# EAGLE board WAK-Shield-v11 (EAGLE 6.2)
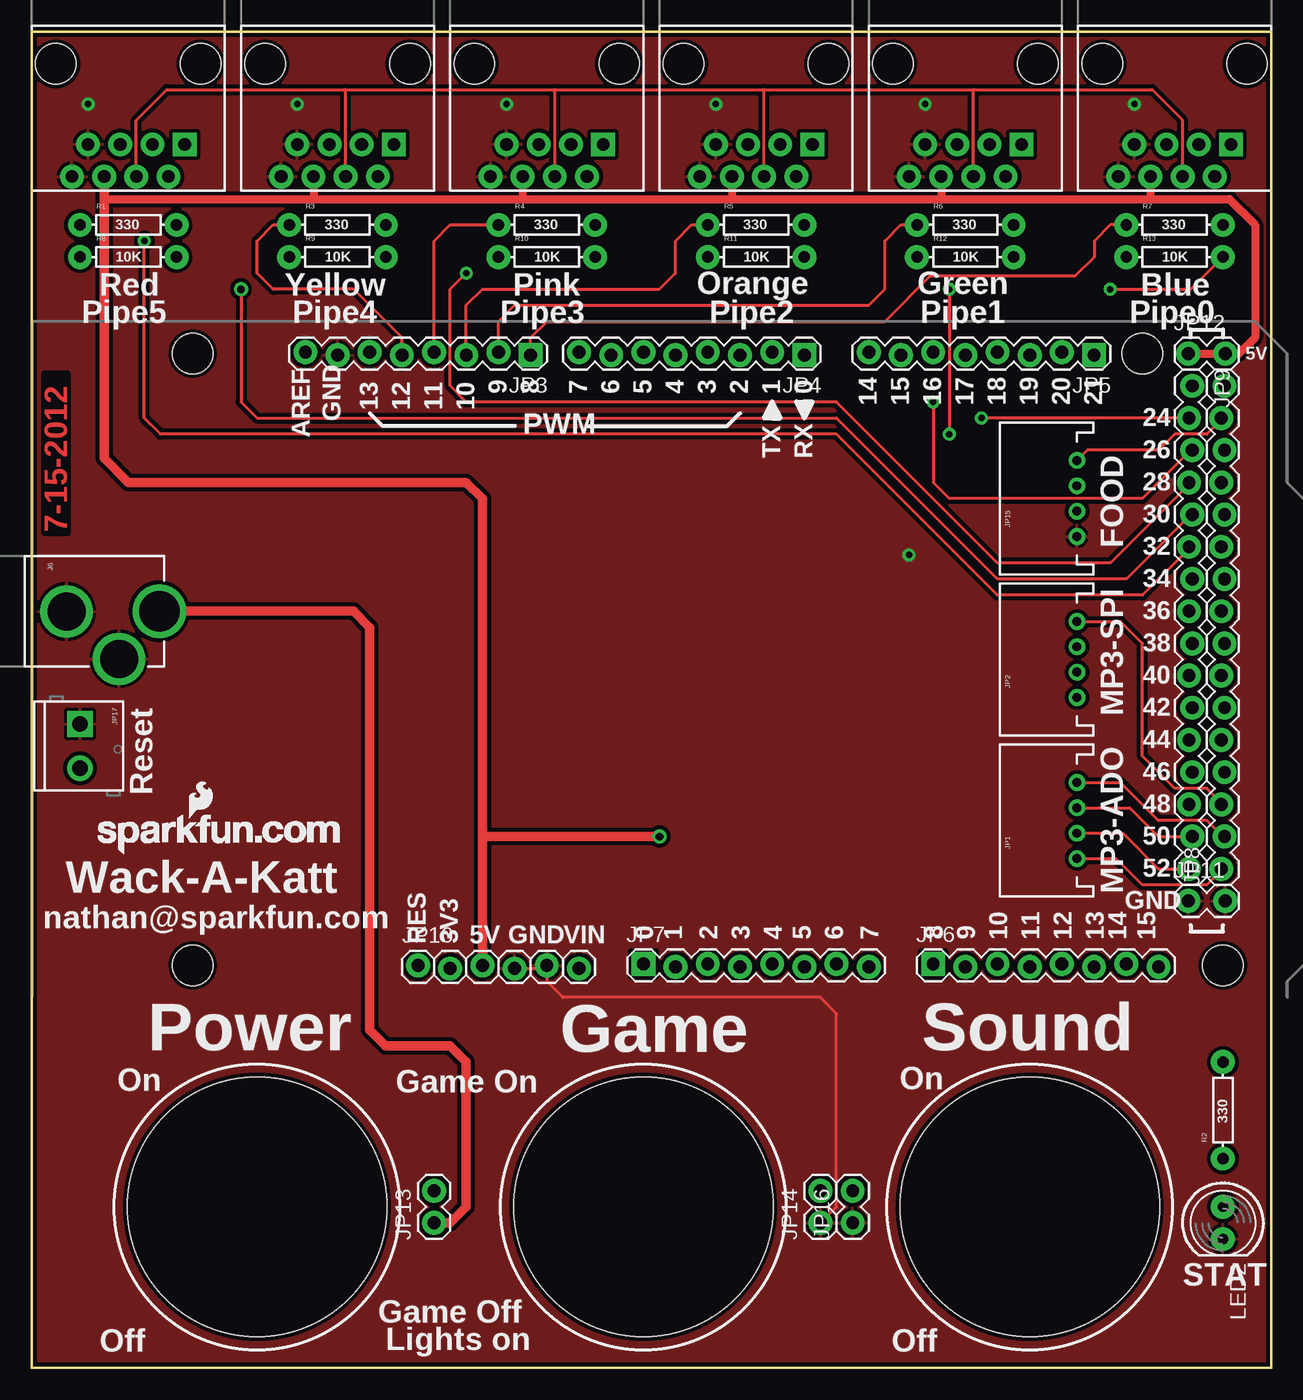
[diagram p0: board, top side]
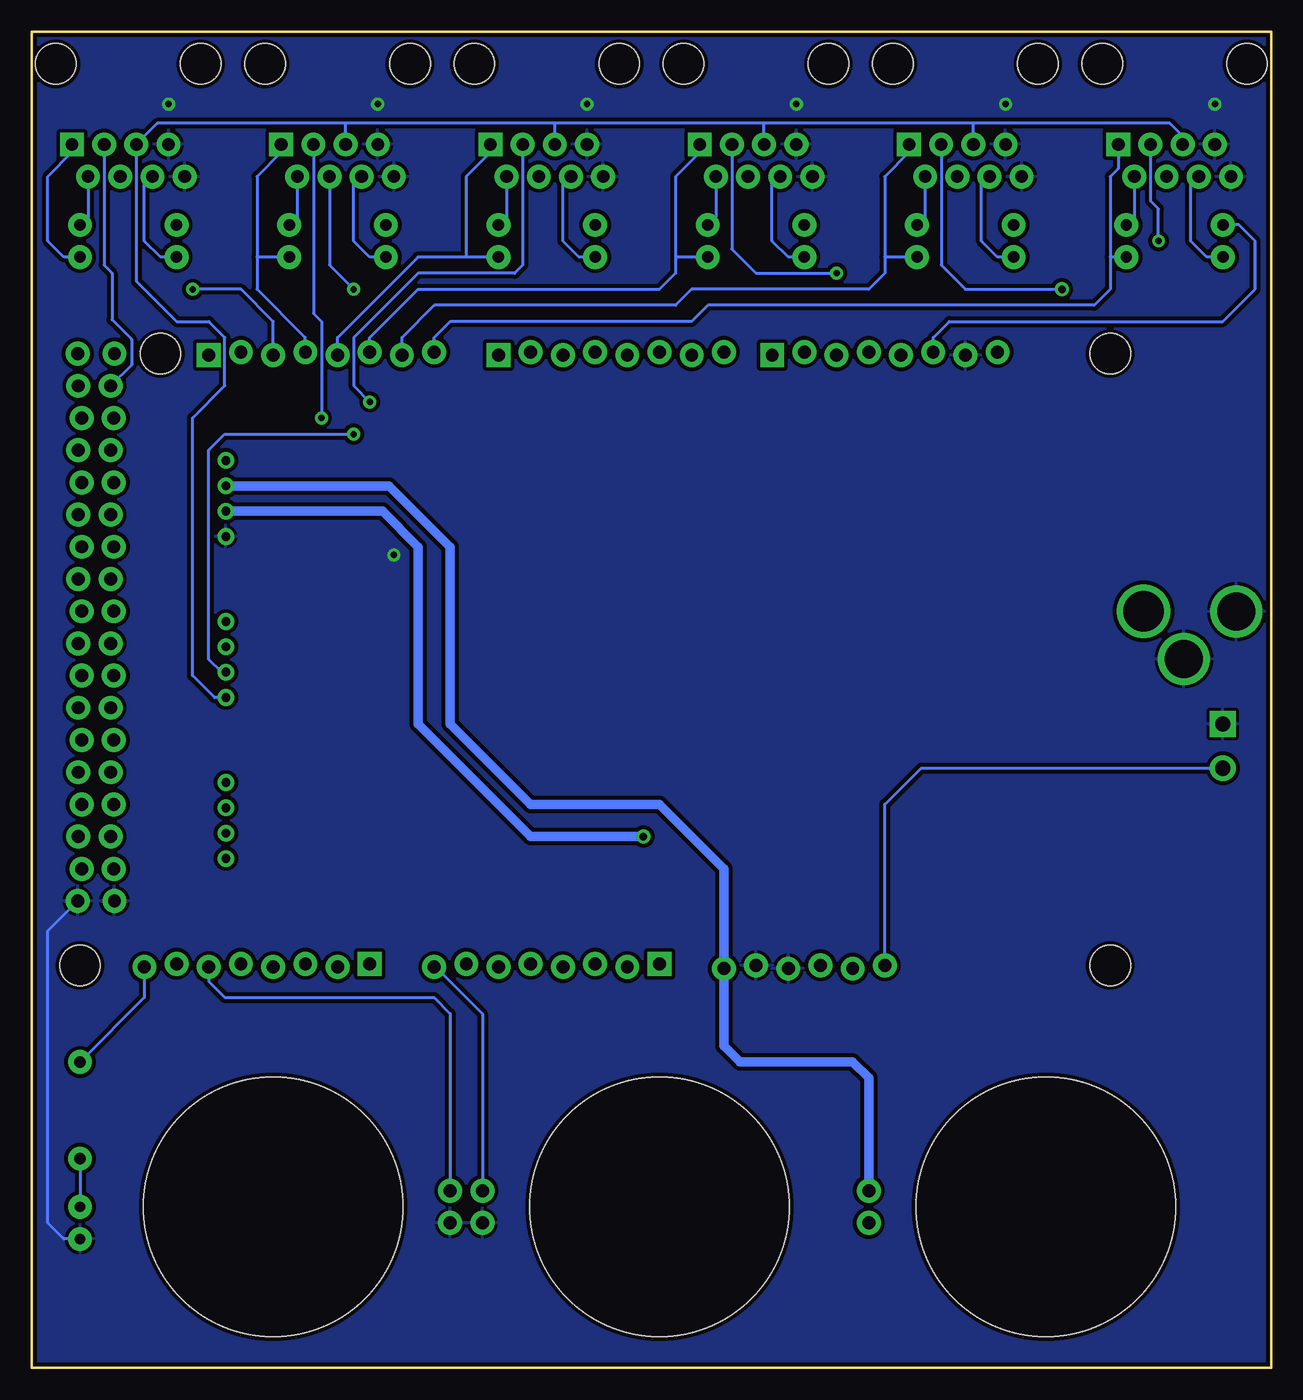
[diagram p1: board, bottom side, seen from below]

Size 97.79 x 105.41 mm. Coordinates in mm from the lower left corner, seen from the top.
Outline: 0,0 97.79,0 97.79,105.41 0,105.41 0,0
Copper layers (1*16): Top 0.035mm / dielectric 1.5mm / Bottom 0.035mm
Design rules: minimum track width 8mil, minimum drill 20mil, track to track 8mil, track to pad 8mil, pad to pad 8mil, via to via 8mil, smd to smd 8mil, copper to edge 10mil, drill to drill 8mil, minimum pad ring 12mil, minimum via ring 10mil, stop-mask expansion 4mil, vias tented up to drill 25mil, thermal gap 10mil
Holes 3.2 mm at 12.7,80.01 12.7,31.75 87.63,80.01 93.98,31.75
Holes 20.5 mm at 17.78,12.7 48.26,12.7 78.74,12.7

## Footprints (pad centres in the part's own frame; a part is rotated, then mirrored left to right if it is on the bottom)
RJ45-8 = drill 1 pad 1.88 square: 1 -4.445,6.35 | drill 1 pad 1.88: 2 -3.175,8.89; 3 -1.905,6.35; 4 -0.635,8.89; 5 0.635,6.35; 6 1.905,8.89; 7 3.175,6.35; 8 4.445,8.89 | hole 3.2: -5.715,0; 5.715,0
POWER_JACK_PTH_LOCK = drill 2.997 pad 4.115: GND 0.025,6.557; GNDBREAK 3.762,10.7 | drill 3.2 pad 4.115: PWR 0,13.878
JST-4-PTH = drill 0.7: 1 -3,-5; 2 -1,-5; 3 1,-5; 4 3,-5
1X08_LOCK = drill 1.016 pad 1.88 square: 1 0,0.127 | drill 1.016 pad 1.88: 2 2.54,-0.127; 3 5.08,0.127; 4 7.62,-0.127; 5 10.16,0.127; 6 12.7,-0.127; 7 15.24,0.127; 8 17.78,-0.127
1X16_LOCK = drill 1.016 pad 1.88: 1 0,0.127; 2 2.54,-0.127; 3 5.08,0.127; 4 7.62,-0.127; 5 10.16,0.127; 6 12.7,-0.127; 7 15.24,0.127; 8 17.78,-0.127; 9 20.32,0.127; 10 22.86,-0.127; 11 25.4,0.127; 12 27.94,-0.127; 13 30.48,0.127; 14 33.02,-0.127; 15 35.56,0.127; 16 38.1,-0.127
1X06_LOCK = drill 1.016 pad 1.88: 1 0,0; 2 2.54,-0.254; 3 5.08,0; 4 7.62,-0.254; 5 10.16,0; 6 12.7,-0.254
1X02_LOCK = drill 1.016 pad 1.88: 1 -0.178,0; 2 2.718,0
1X02 = drill 1.016 pad 1.88: 1 0,0; 2 2.54,0
SCREWTERMINAL-3.5MM-2 = drill 1.2 pad 2.032 square: 1 0,0 | drill 1.2 pad 2.032: 2 3.5,0
LED5MM = drill 0.813 pad 1.88: A -1.27,0; K 1.27,0
AXIAL-0.3 = drill 0.9 pad 1.88: P$1 -3.81,0; P$2 3.81,0

## Placement (x,y rotation side)
J0  RJ45  [RJ45-8]  90.17,102.87 180 top
J1  RJ45  [RJ45-8]  73.66,102.87 180 top
J2  RJ45  [RJ45-8]  57.15,102.87 180 top
J3  RJ45  [RJ45-8]  40.64,102.87 180 top
J4  RJ45  [RJ45-8]  24.13,102.87 180 top
J5  RJ45  [RJ45-8]  7.62,102.87 180 top
J6  12V  [POWER_JACK_PTH_LOCK]  -3.81,59.69 270 top
JP1  MP3-SPI  [JST-4-PTH]  77.47,43.18 90 top
JP2  MP3-ADO  [JST-4-PTH]  77.47,55.88 90 top
JP3  [1X08_LOCK]  39.37,80.01 180 top
JP4  [1X08_LOCK]  60.96,80.01 180 top
JP5  [1X08_LOCK]  83.82,80.01 180 top
JP6  [1X08_LOCK]  71.12,31.75 0 top
JP7  [1X08_LOCK]  48.26,31.75 0 top
JP8  M16LOCK  [1X16_LOCK]  93.98,39.37 90 top
JP9  M16LOCK  [1X16_LOCK]  91.44,77.47 270 top
JP10  [1X06_LOCK]  30.48,31.75 0 top
JP11  [1X02_LOCK]  91.44,36.83 0 top
JP12  [1X02_LOCK]  91.44,80.01 0 top
JP13  Power  [1X02]  31.75,11.43 90 top
JP14  Game  [1X02]  62.23,11.43 90 top
JP15  FOOD  [JST-4-PTH]  77.47,68.58 90 top
JP16  Audio  [1X02]  64.77,11.43 90 top
JP17  Reset  [SCREWTERMINAL-3.5MM-2]  3.81,50.8 270 top
LED2  Green  [LED5MM]  93.98,11.43 270 top
R1  330  [AXIAL-0.3]  7.62,90.17 0 top
R2  330  [AXIAL-0.3]  93.98,20.32 90 top
R3  330  [AXIAL-0.3]  24.13,90.17 0 top
R4  330  [AXIAL-0.3]  40.64,90.17 0 top
R5  330  [AXIAL-0.3]  57.15,90.17 0 top
R6  330  [AXIAL-0.3]  73.66,90.17 0 top
R7  330  [AXIAL-0.3]  90.17,90.17 0 top
R8  10K  [AXIAL-0.3]  7.62,87.63 0 top
R9  10K  [AXIAL-0.3]  24.13,87.63 0 top
R10  10K  [AXIAL-0.3]  40.64,87.63 0 top
R11  10K  [AXIAL-0.3]  57.15,87.63 0 top
R12  10K  [AXIAL-0.3]  73.66,87.63 0 top
R13  10K  [AXIAL-0.3]  90.17,87.63 0 top
U$1  LOGO-SFENEW  [SFE-NEW-WEBLOGO]  5.21,40.51 0 top
U$2  CREATIVE_COMMONS  [CREATIVE_COMMONS]  13.97,5.08 0 top

## Library data of the parts
J0 J1-J6 JP1 JP2 JP13-JP17 = SparkFun-Connectors
JP3-JP12 LED2 R1-R13 U$1 U$2 = SparkFun

## Nets
3.3: JP10.2
5V: J0.6 J1.6 J2.6 J3.6 J4.6 J5.6 JP10.3 JP12.1 JP12.2 JP15.2 R8.P$1 R9.P$1 R10.P$1 R11.P$1 R12.P$1 R13.P$1
A0: JP7.1
A1: JP7.2
A2: JP7.3
A3: JP7.4
A4: JP7.5
A5: JP7.6
A6: JP7.7
A7: JP7.8 JP14.2
A8: JP6.1
A9: JP6.2
A10: JP6.3
A11: JP6.4
A12: JP6.5
AREF: JP3.8
AUDIO-CTL: JP6.6 JP16.2
BTN0: J0.1 JP5.3 R13.P$2
BTN1: J1.1 JP5.4 R12.P$2
BTN2: J2.1 JP5.5 R11.P$2
BTN3: J3.1 JP5.6 R10.P$2
BTN4: J4.1 JP5.7 R9.P$2
BTN5: J5.1 JP5.8 R8.P$2
CTL0: J0.3 JP9.1
CTL1: J1.3 JP9.2
CTL2: J2.3 JP9.3
CTL3: J3.3 JP9.4
CTL4: J4.3 JP9.5
CTL5: J5.3 JP9.6
D2: JP4.3
D3: JP4.4
D4: JP4.5
D5: JP4.6
D6: JP4.7
D7: JP4.8
D34: JP9.7
D36: JP9.8
D37: JP8.9
D38: JP9.9
D39: JP8.8
D40: JP9.10
D41: JP8.7
D42: JP9.11
D43: JP8.6
D44: JP9.12
D45: JP8.5
D46: JP9.13
D47: JP8.4
D48: JP9.14
FOOD1: JP8.15 JP15.4
GND: J0.7 J0.8 J1.7 J1.8 J2.7 J2.8 J3.7 J3.8 J4.7 J4.8 J5.7 J5.8 J6.GND J6.GNDBREAK JP3.7 JP10.4 JP10.5 JP11.1 JP11.2 JP14.1 JP15.1 JP16.1 JP17.1 LED2.K
LED0: J0.2 R7.P$2
LED1: J1.2 R6.P$2
LED2: J2.2 R5.P$2
LED3: J3.2 R4.P$2
LED4: J4.2 R3.P$2
LED5: J5.2 R1.P$2
MISO: JP1.3 JP9.15
MOSI: JP1.4 JP8.2
MP3_RST: JP2.4 JP8.3
N$1: JP3.6 R1.P$1
N$2: JP3.5 R3.P$1
N$3: JP3.4 R4.P$1
N$4: JP3.3 R5.P$1
N$5: JP3.2 R6.P$1
N$6: JP3.1 R7.P$1
N$7: J6.PWR JP13.1
N$127: LED2.A R2.P$1
RES: JP10.1 JP17.2
RX0: JP4.1
SCL: JP5.1
SCLK: JP1.2 JP9.16
SD_CS: JP1.1 JP8.1
SDA: JP5.2
SIG-: J0.5 J1.5 J2.5 J3.5 J4.5 J5.5 JP2.1
SIG-L: J0.4 J1.4 J2.4 J3.4 J4.4 J5.4 JP2.2
SIG-R: JP2.3
STAT: JP6.8 R2.P$2
TX1: JP4.2
VIN: JP10.6 JP13.2 JP15.3

## Tracks (layer width: path | path; a pad name or v marks a point on that pad's centre or on a via)
3.3
  Top 0.203: JP10.2 33.02,31.75
5V  (via drill 0.6)
  Top 0.635: JP12.1 JP12.2 95.25,80.01 96.52,81.28 96.52,90.17 94.49,92.2 88.14,92.2 | 5.71,92.2 22.23,92.2 | 22.23,92.2 38.73,92.2 | 38.73,92.2 55.12,92.2 | 55.12,92.2 71.75,92.2 | 71.75,92.2 88.14,92.2 | J0.6 88.27,92.33 88.14,92.2 | J4.6 22.23,92.2 | J3.6 38.73,92.2 | J2.6 55.24,92.33 55.12,92.2 | J1.6 71.75,92.2
  Top 0.762: v49.53,41.91 35.56,41.91 | JP10.3 35.56,41.91 | 35.56,41.91 35.56,68.58 34.29,69.85 7.62,69.85 5.71,71.75 5.71,92.2 J5.6
  Bottom 0.254: R13.P$1 87.63,87.63 88.9,88.9 88.9,93.34 J0.6 | R12.P$1 71.12,87.63 72.39,88.9 72.39,93.34 J1.6 | R11.P$1 54.61,87.63 55.88,88.9 55.88,93.34 J2.6 | R10.P$1 38.1,87.63 39.37,88.9 39.37,93.34 J3.6 | R9.P$1 21.59,87.63 22.86,88.9 22.86,93.34 J4.6 | R8.P$1 5.08,87.63 6.35,88.9 6.35,93.34 J5.6
  Bottom 0.762: JP15.2 70.12,67.58 67.31,64.77 67.31,50.8 58.42,41.91 v49.53,41.91
A7
  Bottom 0.254: JP7.8 65.91,31.62 62.23,27.94 JP14.2
A8
  Top 0.203: JP6.1 71.12,31.75
A9
  Top 0.203: JP6.2 73.66,31.75
A10
  Top 0.203: JP6.3 76.2,31.75
A11
  Top 0.203: JP6.4 78.74,31.75
A12
  Top 0.203: JP6.5 81.28,31.75
AREF
  Top 0.203: JP3.8 21.59,80.01
AUDIO-CTL
  Bottom 0.254: JP6.6 83.82,30.48 82.55,29.21 66.04,29.21 64.77,27.94 JP16.2
BTN0  (via drill 0.51)
  Top 0.254: v85.09,85.09 91.44,85.09 R13.P$2
  Bottom 0.254: JP5.3 78.74,82.55 81.28,85.09 v85.09,85.09 | J0.1 94.61,95.88 96.52,93.98 96.52,88.9 95.25,87.63 R13.P$2
BTN1
  Bottom 0.254: JP5.4 76.2,81.28 80.01,85.09 80.01,87.63 | J1.1 78.11,95.88 80.01,93.98 80.01,87.63 | R12.P$2 80.01,87.63
BTN2
  Bottom 0.254: JP5.5 73.66,81.28 67.31,87.63 63.5,87.63 | J2.1 61.59,95.88 63.5,93.98 63.5,87.63 | R11.P$2 63.5,87.63
BTN3
  Bottom 0.254: JP5.6 71.12,81.28 67.31,85.09 48.26,85.09 46.99,86.36 46.99,87.63 | J3.1 45.09,95.88 46.99,93.98 46.99,87.63 | R10.P$2 46.99,87.63
BTN4
  Bottom 0.254: JP5.7 68.58,81.28 66.04,83.82 46.99,83.82 45.72,85.09 31.75,85.09 30.48,86.36 30.48,87.63 | J4.1 28.57,95.88 30.48,93.98 30.48,87.63 | R9.P$2 30.48,87.63
BTN5
  Bottom 0.254: JP5.8 66.04,81.28 64.77,82.55 45.72,82.55 44.45,83.82 13.97,83.82 12.7,85.09 12.7,87.63 | J5.1 12.06,94.62 12.7,93.98 12.7,87.63 | R8.P$2 12.7,87.63
CTL0
  Bottom 0.254: J0.3 92.08,87 91.44,86.36 91.44,82.68 89.92,81.15 89.92,79.12 JP9.1
CTL1  (via drill 0.51)
  Top 0.254: JP9.2 v74.93,74.93
  Bottom 0.254: J1.3 75.56,83.19 74.93,82.55 v74.93,74.93
CTL2  (via drill 0.51)
  Top 0.254: JP9.3 91.44,72.39 87.63,68.58 72.39,68.58 71.12,69.85 v71.12,76.2
  Bottom 0.254: J2.3 59.05,87 59.69,86.36 67.31,86.36 72.39,81.28 72.39,77.47 v71.12,76.2
CTL3  (via drill 0.51)
  Top 0.254: JP9.4 91.31,69.72 85.09,63.5 76.2,63.5 63.5,76.2 34.29,76.2 33.02,77.47 33.02,85.09 v34.29,86.36
  Bottom 0.254: J3.3 42.55,88.27 40.64,86.36 v34.29,86.36
CTL4  (via drill 0.6)
  Top 0.254: JP9.5 91.44,67.31 86.36,62.23 76.2,62.23 63.5,74.93 17.78,74.93 16.51,76.2 v16.51,85.09
  Bottom 0.254: v16.51,85.09 24.13,85.09 26.04,87 J4.3
CTL5  (via drill 0.51)
  Top 0.254: JP9.6 91.31,64.64 87.63,60.96 76.2,60.96 63.5,73.66 10.16,73.66 8.89,74.93 v8.89,88.9
  Bottom 0.254: J5.3 9.53,92.08 8.89,91.44 v8.89,88.9
D2
  Top 0.203: JP4.3 55.88,80.01
D3
  Top 0.203: JP4.4 53.34,80.01
D4
  Top 0.203: JP4.5 50.8,80.01
D5
  Top 0.203: JP4.6 48.26,80.01
D6
  Top 0.203: JP4.7 45.72,80.01
D7
  Top 0.203: JP4.8 43.18,80.01
FOOD1
  Top 0.254: JP8.15 93.85,74.8 92.71,73.66 90.17,73.66 88.9,72.39 83.28,72.39 JP15.4
GND  (via drill 0.51)
  Top 0.254: JP14.1 63.5,12.7 63.5,27.94 62.23,29.21 41.91,29.21 40.64,30.48 JP10.5 40.39,31.5 JP10.4
  Bottom 0.254: LED2.K 95.25,10.16 96.52,11.43 96.52,34.47 JP11.2
  other vias: 20.95,99.69 37.47,99.69 53.98,99.69 70.48,99.69 87,99.69 4.45,99.69 69.22,64.13
  pour Bottom (isolate 0.305): 0,0 97.79,0 97.79,105.41 0,105.41
  pour Top (isolate 0.305): 0,0 97.79,0 97.79,105.41 0,105.41
LED0
  Bottom 0.254: J0.2 93.34,90.81 R7.P$2
LED1
  Bottom 0.254: J1.2 76.83,90.81 R6.P$2
LED2
  Bottom 0.254: J2.2 60.33,90.81 R5.P$2
LED3
  Bottom 0.254: J3.2 43.81,90.81 R4.P$2
LED4
  Bottom 0.254: J4.2 27.3,90.81 R3.P$2
LED5
  Bottom 0.254: J5.2 10.79,90.81 R1.P$2
MISO
  Top 0.254: JP9.15 88.9,41.91 86.63,44.18 JP1.3
MOSI
  Top 0.254: JP8.2 93.98,41.91 92.71,43.18 88.9,43.18 85.9,46.18 JP1.4
MP3_RST
  Top 0.254: JP8.3 93.85,44.58 92.71,45.72 90.17,45.72 87.63,48.26 87.63,57.15 85.9,58.88 JP2.4
N$1
  Bottom 0.254: R1.P$1 2.54,90.17 1.27,88.9 1.27,85.09 3.81,82.55 25.4,82.55 26.67,81.28 JP3.6
N$2
  Top 0.254: JP3.5 29.21,81.28 25.4,85.09 19.05,85.09 17.78,86.36 17.78,88.9 19.05,90.17 R3.P$1
N$3
  Top 0.254: JP3.4 31.75,88.9 33.02,90.17 R4.P$1
N$4
  Top 0.254: JP3.3 34.29,83.82 35.56,85.09 49.53,85.09 50.8,86.36 50.8,88.9 52.07,90.17 R5.P$1
N$5
  Top 0.254: JP3.2 36.83,82.55 38.1,83.82 66.04,83.82 67.31,85.09 67.31,88.9 68.58,90.17 R6.P$1
N$6
  Top 0.254: JP3.1 39.37,81.28 40.64,82.55 67.31,82.55 70.87,86.11 82.3,86.11 83.82,87.63 83.82,88.9 85.09,90.17 R7.P$1
N$7
  Top 0.762: J6.PWR 25.4,59.69 26.67,58.42 26.67,26.67 27.94,25.4 33.02,25.4 34.29,24.13 34.29,12.7 33.02,11.43 JP13.1
N$127
  Bottom 0.254: R2.P$1 LED2.A
RES
  Bottom 0.254: JP10.1 30.48,44.45 27.63,47.3 JP17.2
RX0
  Top 0.203: JP4.1 60.96,80.01
SCLK
  Top 0.254: JP1.2 86.09,42.18 88.9,39.37 JP9.16
SD_CS
  Top 0.254: JP8.1 93.85,39.24 92.71,38.1 87.63,38.1 85.55,40.18 JP1.1
SIG-
  Bottom 0.254: JP2.1 83.36,52.88 85.09,54.61 85.09,74.93 82.55,77.47 82.55,81.28 83.82,82.55 86.36,82.55 89.53,85.72 J0.5 87.88,98.17 73.03,98.17 | J5.5 6.99,97.16 8,98.17 23.5,98.17 | 23.5,98.17 40.01,98.17 | 40.01,98.17 56.52,98.17 | 56.52,98.17 73.03,98.17 | J1.5 73.03,98.17 | J2.5 56.52,98.17 | J3.5 40.01,98.17 | J4.5 23.5,98.17
SIG-L  (via drill 0.51)
  Top 0.254: J5.4 8.26,98.43 10.67,100.84 24.77,100.84 | J4.4 24.77,100.84 | v72.39,85.09 v72.39,73.66 | J0.4 90.81,98.43 88.39,100.84 74.3,100.84 | 24.77,100.84 41.27,100.84 | 41.27,100.84 57.78,100.84 | 57.78,100.84 74.3,100.84 | J3.4 41.27,100.84 | J2.4 57.78,100.84 | J1.4 74.3,100.84
  Bottom 0.254: J1.4 74.3,87 v72.39,85.09 | v72.39,73.66 82.55,73.66 83.82,72.39 83.82,55.88 82.82,54.88 JP2.2
STAT
  Bottom 0.254: JP6.8 88.9,29.21 R2.P$2
TX1
  Top 0.203: JP4.2 58.42,80.01
VIN
  Bottom 0.762: JP15.3 69.58,69.58 64.77,64.77 64.77,50.8 58.42,44.45 48.26,44.45 43.18,39.37 JP10.6 43.18,25.4 41.91,24.13 33.02,24.13 31.75,22.86 JP13.2

## Text on the board
Top: 7-15-2012
tPlace: Red | Yellow | Pink | Orange | Green | Blue | Pipe5 | Pipe4 | Pipe3 | Pipe2 | Pipe1 | Pipe0 | 5V | 9 | 8 | 7 | 6 | 5 | 4 | 3 | 2 | 1 | 0 | 14 | 15 | 16 | 17 | 18 | 19 | 20 | 21 | 13 | 12 | 11 | 10 | GND | 24 | AREF | PWM | TX | RX | FOOD | 26 | 28 | 30 | 32 | MP3-SPI | 34 | 36 | 38 | 40 | 42 | MP3-ADO | 44 | 46 | Reset | 48 | 50 | 52 | Wack-A-Katt | GND | nathan@sparkfun.com | 0 | 1 | 2 | 3 | 4 | 5 | 6 | 7 | 8 | 9 | 10 | 11 | 12 | 13 | 14 | 15 | RES | 3V3 | 5V | GND | VIN | Power | Game | Sound | On | Game On | On | STAT | Game Off | Off | Lights on | Off